# Altium PCB WB-AV-4502-PDB-REV-0.pcbdoc
Units mm, origin at the board's own origin, x right, y up, seen from the top; angles counter-clockwise.
Board outline 78.06 x 63.12 mm, 2 copper layers (Top Layer, Bottom Layer), stack 1.671 mm thick; 51 components, 31 nets, 166 pads, 131 vias.
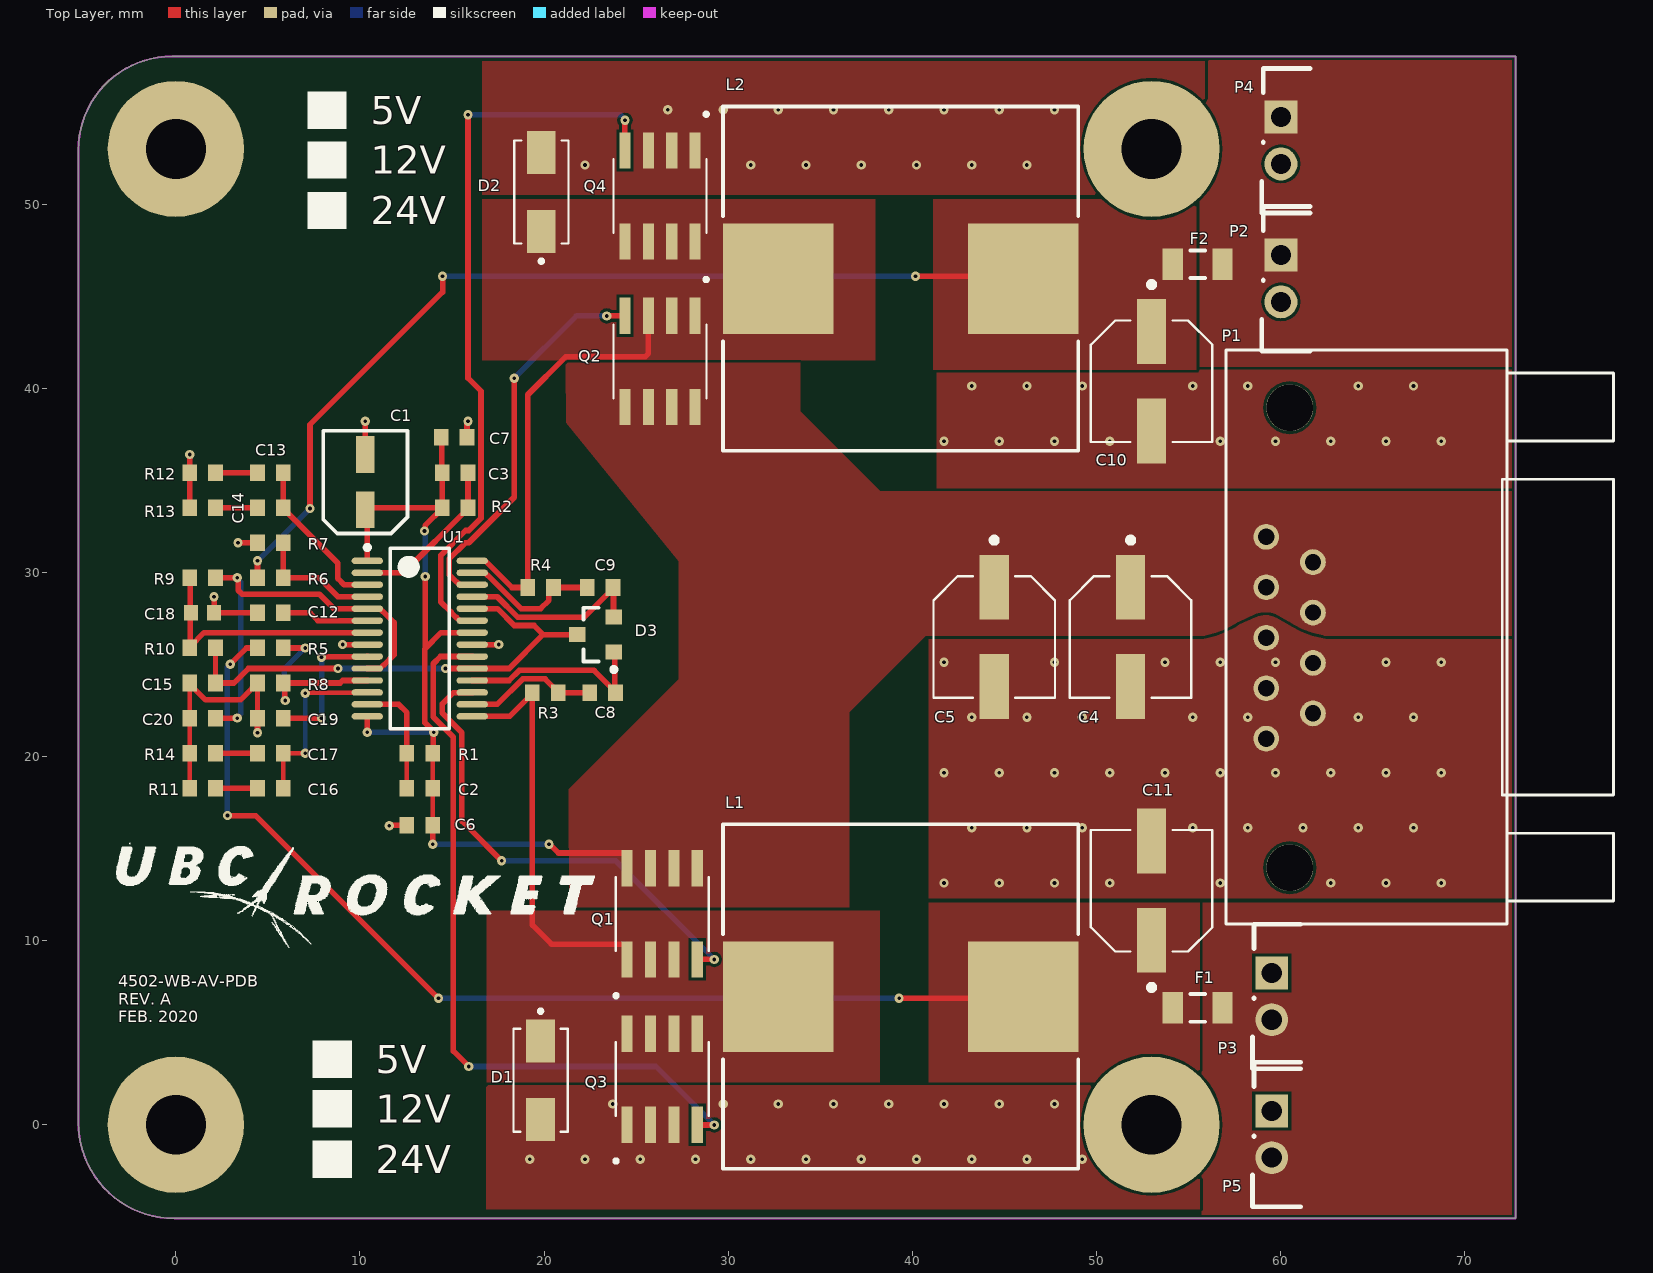
[diagram p0: Top Layer view]
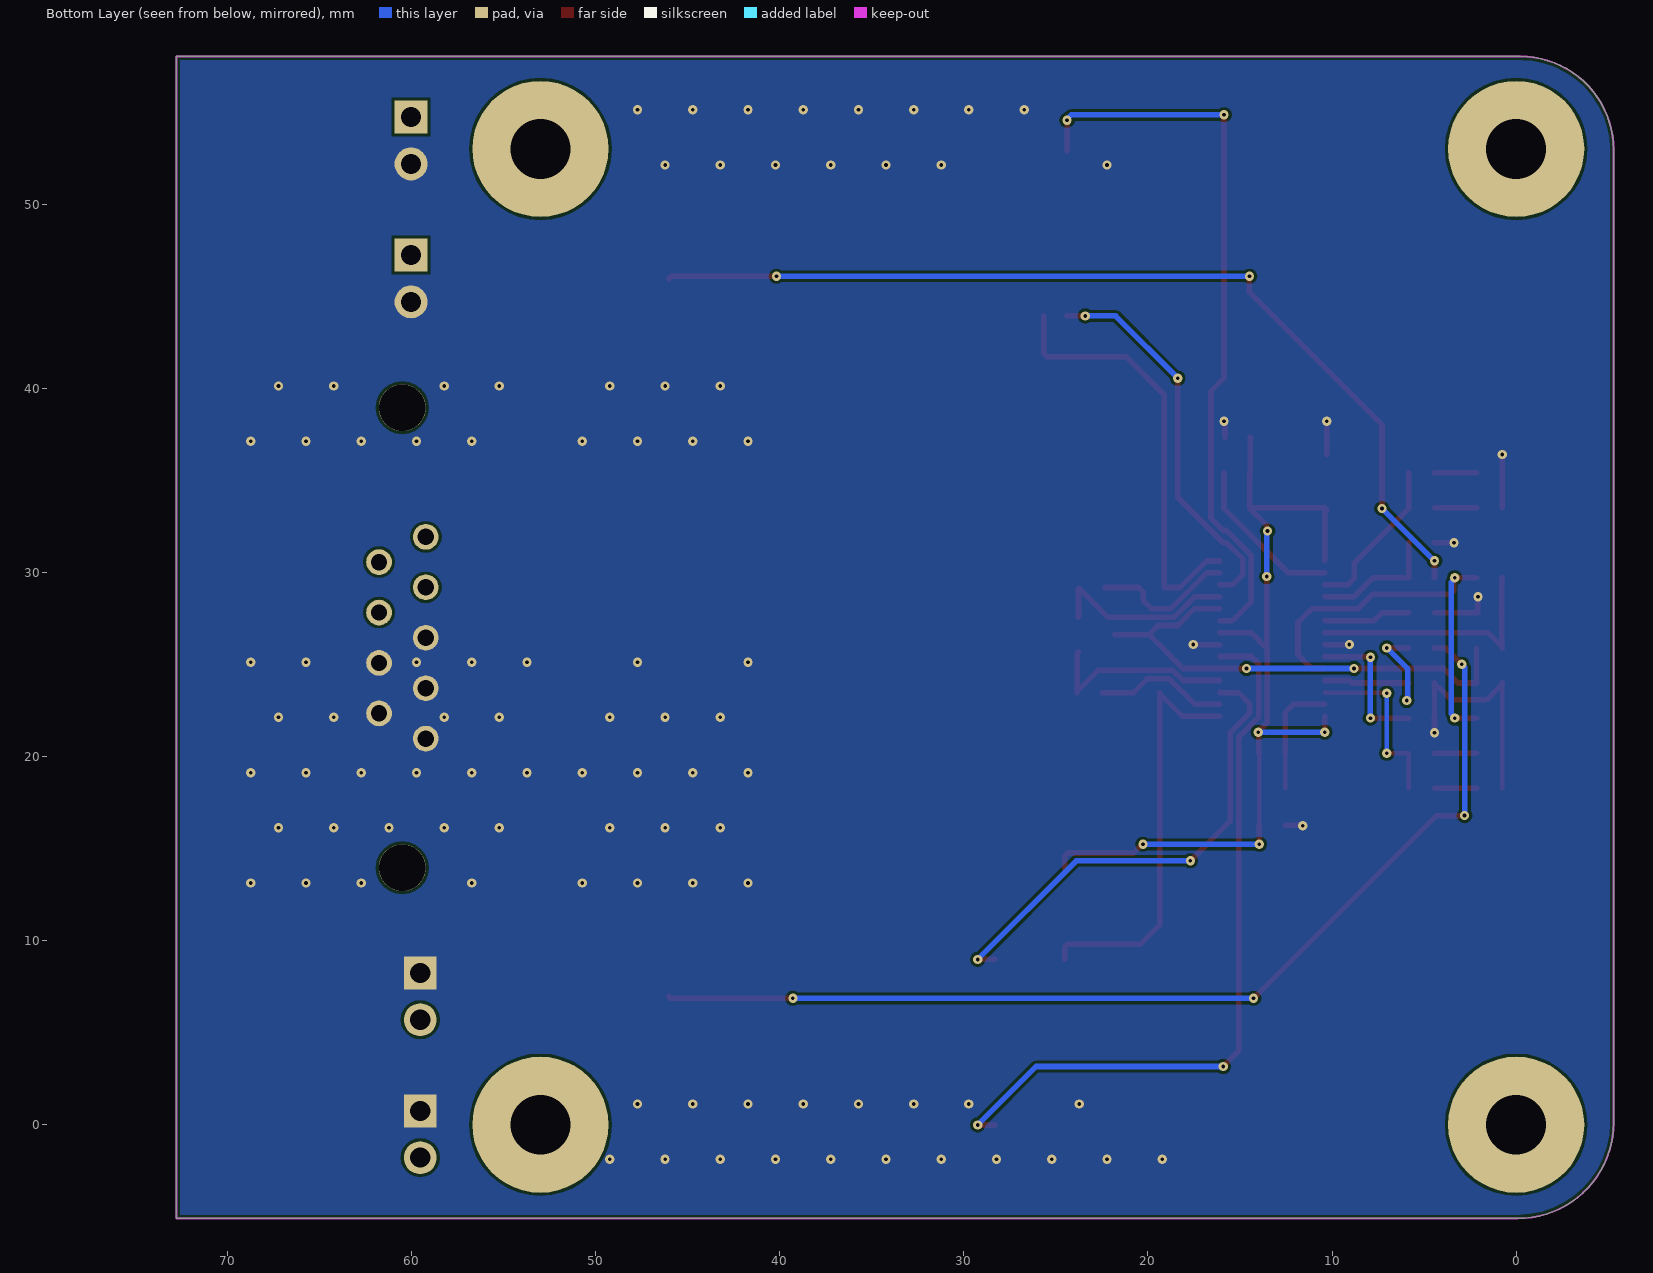
[diagram p1: Bottom Layer view, seen from below]

## Layer stack, top to bottom
Top Solder: solder mask 0.0102, Solder Resist, Dk 3.5
Top Layer: signal copper 0.0356
Dielectric 1: dielectric 1.6, FR-4, Dk 4.8
Bottom Layer: signal copper 0.0356
Bottom Solder: solder mask 0.0102, Solder Resist, Dk 3.5

## Board outline
-0.086,-5.093 72.771,-5.093 72.771,58.026 -0.213,58.026 ccw(c-0.213,52.946) -5.293,52.946 -5.293,0.114 ccw(c-0.086,0.114)

## Design rules (kind name [scope] priority, off if disabled: settings)
Clearance [All] p1: gap=0.152 ignorepadtopadclearanceinfootprint=FALSE except(0: Arc-Hole Track-Hole SMDPad-Hole THPad-Hole Via-Hole Fill-Hole Poly-Hole Region-Hole Text-Hole)
ComponentClearance [All] p1: gap=0 collisioncheckmode=3 verticalgap=0.003 showdistances=FALSE
Creepage [All] p1: checkdistance=0.254
HoleSize [All] p1: absolutevalues=TRUE maxlimit=25.4 minlimit=0.025 maxpercent=80.000 minpercent=20.000
MinimumSolderMaskSliver [All] p1: minsoldermaskwidth=0.025
PolygonConnect [All] p1: connectstyle=Direct reliefconductorwidth=0.254 reliefentries=4 polygonreliefangle="90 Angle" airgapwidth=0.254
RoomDefinition Regulators1 [InComponentClass('Regulators1')] p1: confinementstyle=ConfineIn formatcopy=TRUE lockcomponents=FALSE outline 0.168,-5.842 78.527,-5.842 78.527,57.518 0.168,57.518
RoutingVias [All] p1: holewidth=0.2 width=0.505 viastyle="Through Hole" minholewidth=0.2 minwidth=0.505 maxholewidth=0.711 maxwidth=1.27
ShortCircuit [InNet('No Net')] p1: allowed=FALSE
SilkToSilkClearance [All] p1: silktosilkclearance=0.025
SilkToSolderMaskClearance [IsPad] p1: minsilkscreentomaskgap=0.025 clearancetoexposedcopper=TRUE
SolderMaskExpansion [All] p1: expansion=0.102 istentingtop=FALSE
Width [All] p1: maxlimit=5.08 minlimit=0.254 preferedwidth=0.305
24 further rules are at their usual default settings.

## Components (designator, comment, footprint, x,y, rotation, side; value= is the part's Value field where it differs from the comment)
C1 "Cap Pol1" 1u50VcapE 10.287,34.901 r270 top value=1uF
C2 "Cap" 1608[0603] 13.249,18.275 r0 top value=10nF
C3 "Cap" 1608[0603] 15.168,35.42 r0 top value=10nF
C4 "Cap Pol1" CAPAE660X800N 51.857,26.499 r270 top value=22uF
C5 "Cap Pol1" CAPAE660X800N 44.45,26.499 r270 top value=22uF
C6 "Cap" 1608[0603] 13.249,16.256 r0 top value=10nF
C7 "Cap" 1608[0603] 15.113,37.338 r180 top value=10nF
C8 "Cap" 1608[0603] 23.176,23.462 r180 top value=0.1uF
C9 "Cap" 1608[0603] 23.049,29.177 r180 top value=0.1uF
C10 "Cap Pol1" CAPAE660X800N 53,40.381 r270 top value=100uF
C11 "Cap Pol1" CAPAE660X800N 53,12.71 r90 top value=100uF
C12 "Cap" 1608[0603] 5.135,27.8 r0 top value=0.1uF
C13 "Cap" 1608[0603] 5.135,35.42 r0 top value=22nF
C14 "Cap" 1608[0603] 5.135,33.515 r0 top value=100pF
C15 "Cap" 1608[0603] 1.452,23.99 r0 top value=1uF
C16 "Cap" 1608[0603] 5.135,18.275 r0 top value=10nF
C17 "Cap" 1608[0603] 5.135,20.18 r0 top value=56pF
C18 "GRM188R6YA475KE15D" CAPC1608X90X35LL10T15 1.452,27.8 r180 top
C19 "Cap" 1608[0603] 5.135,22.085 r0 top value=10nF
C20 "Cap" 1608[0603] 1.452,22.085 r0 top value=10nF
D1 "Diode MBRS140t3" *DIOM5227X270N_S1M(Primary) 19.812,2.413 r270 top
D2 "Diode MBRS140t3" *DIOM5227X270N_S1M(Primary) 19.853,50.659 r90 top
D3 "BAW56LT3" ONSC-SOT-23-3-318-08_V 22.795,26.623 r180 top
F1 "Fuse 1" C1206 55.499,6.35 r180 top
F2 "Fuse 1" C1206 55.499,46.736 r0 top
L1 "74435572200" WE-HCI-1890 39.37,6.962 r180 top
L2 "74435571500" WE-HCI-1890 39.37,45.951 r0 top
P1 "3-338168-2" CONN_3-338168-2 38.563,31.929 r90 top locked
P2 "Header 2" WM4900-ND 58.5,39.459 r0 top
P3 "Header 2" WM4900-ND 58,0.47 r0 top
P4 "Header 2" WM4900-ND 58.5,46.952 r0 top
P5 "Header 2" WM4900-ND 58,-7.023 r0 top
Q1 "MOSFET-N" *SOIC127P600X175-8N 26.416,11.452 r90 top
Q2 "MOSFET-N" *SOIC127P600X175-8N 26.3,41.461 r270 top
Q3 "MOSFET-N" *SOIC127P600X175-8N 26.416,2.472 r90 top
Q4 "MOSFET-N" *SOIC127P600X175-8N 26.3,50.441 r270 top
R1 "Res1" 1608[0603] 13.249,20.18 r0 top value=13k
R2 "Res1" 1608[0603] 15.168,33.515 r180 top value=13K
R3 "Res1" 1608[0603] 20.066,23.462 r180 top value=4.7k
R4 "Res1" 1608[0603] 19.812,29.177 r180 top value=4.7k
R5 "Res1" 1608[0603] 5.135,25.895 r180 top value=100k
R6 "Res1" 1608[0603] 5.135,29.705 r180 top value=60k
R7 "Res1" 1608[0603] 5.135,31.61 r0 top value=20k
R8 "Res1" 1608[0603] 5.135,23.99 r0 top value=11.5k
R9 "Res1" 1608[0603] 1.452,29.705 r0 top value=220K
R10 "Res1" 1608[0603] 1.452,25.895 r0 top value=4.7k
R11 "Res1" 1608[0603] 1.452,18.275 r0 top value=47.4k
R12 "Res1" 1608[0603] 1.452,35.42 r0 top value=20k
R13 "Res1" 1608[0603] 1.452,33.515 r0 top value=20k
R14 "Res1" 1608[0603] 1.452,20.18 r0 top value=20k
U1 "LM2642MTC/NOPB" MTC28_N 13.249,26.403 r0 top

## Footprints (in the part's own frame and the unit in brackets; to place one, negate y for a bottom-side part, rotate by r counter-clockwise, add the part's x,y. Pads: shape width x height; smd on the part's side, far side on the other; paste and mask are expansions set on the pad)
1u50VcapE [mm]
  rect 2x1 smd: 1(1.5,0) 2(-1.5,0)
  silkscreen extent -2.79,-2.29 2.79,2.3
1608[0603] [mm] "Chip Capacitor, Body 1.6x0.8mm, IPC High Density"
  rect 0.8x0.9 smd: 1(-0.7,0) 2(0.7,0)
  body extent -0.87,-0.48 0.87,0.48, height 1.3
*DIOM5227X270N_S1M(Primary) [mm]
  rect 2.33x1.56 smd: A(2.14,0) C(-2.14,0)
  silkscreen extent -3.85,-1.48 2.8,1.48
*SOIC127P600X175-8N [mm]
  rect 1.97x0.6 smd: 1(2.475,-1.905) 1(2.475,-0.635) 1(2.475,0.635) 1(2.475,1.905) 2(-2.475,-1.905) 3(-2.475,-0.635) 3(-2.475,0.635) 3(-2.475,1.905)
  silkscreen extent -4.54,-2.52 2,2.6
C1206 [mm] "Chip Capacitor, Body 3.2x1.6mm, IPC High Density"
  rect 1.1x1.7 smd: 1(-1.35,0) 2(1.35,0)
  silkscreen extent -0.4,-0.75 0.4,0.75, body extent -1.7,-0.9 1.7,0.9, height 1.3
CAPAE660X800N [mm]
  rect 3.51x1.58 smd: 1(-2.7,0) 2(2.7,0)
  silkscreen extent -5.4,-3.3 3.3,3.3, body extent -3.9,-3.3 3.9,3.3, height 8.06
CAPC1608X90X35LL10T15 [mm] "Chip Capacitor, 2-Leads, Body 1.60x0.80mm, IPC High Density"
  rect 0.75x0.85 smd: 1(-0.625,0) 2(0.625,0)
  body extent -0.85,-0.45 0.85,0.45, height 0.9
CONN_3-338168-2 [mil]
  round 55 hole 35: 1(-431.5,-813.39) 2(-377.56,-913.39) 3(-323.62,-813.39) 4(-269.69,-913.39) 5(-215.75,-813.39) 6(-161.81,-913.39) 7(-107.87,-813.39) 8(-53.94,-913.39) 9(0,-813.39)
  round 100 hole 100: 10(-707.75,-863.69) 11(276.25,-863.69)
  silkscreen extent -828,-1556 399,-727, body extent -827,-1569 397,-730, height 107
MTC28_N [mm] "TSOP, 28-Leads, Body 9.7x4.4mm, Pitch 0.65mm, IPC Medium Density"
  oval 1.7x0.35 smd: 1(-2.85,4.225) 2(-2.85,3.575) 3(-2.85,2.925) 4(-2.85,2.275) 5(-2.85,1.625) 6(-2.85,0.975) 7(-2.85,0.325) 8(-2.85,-0.325) 9(-2.85,-0.975) 10(-2.85,-1.625) 11(-2.85,-2.275) 12(-2.85,-2.925) 13(-2.85,-3.575) 14(-2.85,-4.225) 15(2.85,-4.225) 16(2.85,-3.575) 17(2.85,-2.925) 18(2.85,-2.275) 19(2.85,-1.625) 20(2.85,-0.975) 21(2.85,-0.325) 22(2.85,0.325) 23(2.85,0.975) 24(2.85,1.625) 25(2.85,2.275) 26(2.85,2.925) 27(2.85,3.575) 28(2.85,4.225)
  silkscreen extent -2.97,-4.9 1.6,5.07, body extent -2.25,-4.9 2.25,4.9, height 1.1
ONSC-SOT-23-3-318-08_V [mm] "SOT23, 3-Leads, Body 2.92x1.3mm, Pitch 0.95mm"
  rect 0.9x0.8 smd: 1(-1,0.95) 2(-1,-0.95) 3(1,0)
  silkscreen extent -1.13,-1.46 0.65,2.02, body extent -0.65,-1.46 0.65,1.46, height 1.11
WE-HCI-1890 [mm] "Inductor, 2-Leads, Body 18.3 x 18.2 mm"
  rect 6x6 smd: 1(-6.65,0) 2(6.65,0)
  silkscreen extent -9.65,-9.35 9.65,9.35, body extent -9.15,-9.1 9.15,9.1, height 8.85
WM4900-ND [mm]
  rect 1.79x1.79 hole 1.09: 1(1.524,7.772)
  round 1.79 hole 1.09: 2(1.524,5.232)
  silkscreen extent 0.48,2.57 3.1,10.42, body extent 0.89,2.84 14.48,10.21, height 7.11

## Part data
C1: "Polarized Capacitor (Radial)", LatestRevisionDate=17-Jul-2002, LatestRevisionNote="Re-released for DXP Platform.", PackageDescription="Polarized Capacitor (Radial); 2 Leads", PackageReference=RB7.6-15, Published=8-Jun-2000, Publisher="Altium Limited"
C2 C3 C6 C7 C16 C19 C20: "CAP CER 10000PF 100V NP0 0603", Capacitance=10nF, Case Code (Imperial)=0603, Case Code (Metric)=1608, Manufacturer=TDK, Manufacturer Part Number=CGA3EANP02A103J080AC, Max Operating Temperature=150°C, Min Operating Temperature=-55°C, Package Quantity=1, Ratings=AEC-Q200, Supplier Part Number 1=445-16165-1-ND, Tolerance=5%, Voltage Rating=100V, Case/Package=0603, Category="Ceramic Capacitors", ComponentLink1Description=https://datasheet.ciiva.com/29540/mlcc-automotive-esd-en-29540271.pdf?src-supplier=Digi-Key, ComponentLink1URL=https://datasheet.ciiva.com/29540/mlcc-automotive-esd-en-29540271.pdf?src-supplier=Digi-Key, LatestRevisionDate=17-Jul-2002, LatestRevisionNote="Re-released for DXP Platform.", Length=0.063inch, Mount="Surface Mount", PackageDescription="Radial Cap, Thru-Hole; 2 Leads; 0.3 in Pin Spacing", PackageReference=RAD-0.3, Packaging="Cut Tape", Pricing 1="1=0.39000, 10=0.27200, 100=0.16300, 500=0.12226, 1000=0.10324 (USD)", Published=8-Jun-2000, Publisher="Altium Limited", RoHS=Yes, Stock 1=406, Supplier 1=Digi-Key, Thickness=0.035inch, Width=0.031inch
C4 C5: "Polarized Capacitor (Radial)", Supplier Part Number 1=P122128CT-ND, LatestRevisionDate=17-Jul-2002, LatestRevisionNote="Re-released for DXP Platform.", PackageDescription="Polarized Capacitor (Radial); 2 Leads", PackageReference=RB7.6-15, Published=8-Jun-2000, Publisher="Altium Limited", Supplier 1=Digi-Key
C8 C9 C12: "CAP CER 0.1UF 50V X7R 0603", Capacitance=100nF, Case Code (Imperial)=0603, Case Code (Metric)=1608, Dielectric=X7R, Manufacturer=Murata, Manufacturer Part Number=GCM188R71H104JA57D, Max Operating Temperature=125°C, Min Operating Temperature=-55°C, Ratings=AEC-Q200, Supplier Part Number 1=490-14357-1-ND, Tolerance=5%, Voltage Rating=50V, Case/Package=0603, Category="Ceramic Capacitors", ComponentLink1Description=http://search.murata.co.jp/Ceramy/image/img/A01X/partnumbering_e_02.pdf?src-supplier=Digi-Key, ComponentLink1URL=http://search.murata.co.jp/Ceramy/image/img/A01X/partnumbering_e_02.pdf?src-supplier=Digi-Key, ComponentLink2Description=https://www.murata.com/~/media/webrenewal/support/library/catalog/products/capacitor/mlcc/c03e.ashx?la=en-us&src-supplier=Digi-Key, ComponentLink2URL=https://www.murata.com/~/media/webrenewal/support/library/catalog/products/capacitor/mlcc/c03e.ashx?la=en-us&src-supplier=Digi-Key, LatestRevisionDate=17-Jul-2002, LatestRevisionNote="Re-released for DXP Platform.", Mount="Surface Mount", PackageDescription="Radial Cap, Thru-Hole; 2 Leads; 0.3 in Pin Spacing", PackageReference=RAD-0.3, Packaging="Cut Tape", Pricing 1="1=0.32000, 10=0.22100, 100=0.13260, 500=0.09944, 1000=0.08397 (USD)", Published=8-Jun-2000, Publisher="Altium Limited", RoHS=No, Stock 1=31481, Supplier 1=Digi-Key, Voltage Rating (DC)=50V
C10 C11: "Polarized Capacitor (Radial)", Supplier Part Number 1=P121401CT-ND, LatestRevisionDate=17-Jul-2002, LatestRevisionNote="Re-released for DXP Platform.", PackageDescription="Polarized Capacitor (Radial); 2 Leads", PackageReference=RB7.6-15, Published=8-Jun-2000, Publisher="Altium Limited", SPN=P121401TR-ND, Supplier 1=Digi-Key
C13: "0603 22 nF 50 V ±5% Tolerance X7R SMT Multilayer Ceramic Capacitor", Capacitance=22nF, Case Code (Imperial)=0603, Case Code (Metric)=1608, Dielectric=X7R, Manufacturer="Walsin Technologies", Manufacturer Part Number=0603B223J500CT, Max Operating Temperature=125°C, Min Operating Temperature=-55°C, Supplier Part Number 1=1292-1414-1-ND, Tolerance=5%, Voltage Rating=50V, Case/Package=0603, Category=Uncategorized, ComponentLink1Description=https://datasheet.ciiva.com/26864/getdatasheetpartid-660917-26864527.pdf?src-supplier=Verical, ComponentLink1URL=https://datasheet.ciiva.com/26864/getdatasheetpartid-660917-26864527.pdf?src-supplier=Verical, ComponentLink2Description=http://datasheet.octopart.com/0603B223J500CT-Walsin-Technologies-datasheet-62066062.pdf?src-supplier=Element14, ComponentLink2URL=http://datasheet.octopart.com/0603B223J500CT-Walsin-Technologies-datasheet-62066062.pdf?src-supplier=Element14, ComponentLink3Description=http://datasheet.octopart.com/0603B223J500CT-Walsin-Technologies-datasheet-85392065.pdf?src-supplier=Element14, ComponentLink3URL=http://datasheet.octopart.com/0603B223J500CT-Walsin-Technologies-datasheet-85392065.pdf?src-supplier=Element14, ComponentLink4Description=http://datasheet.octopart.com/0603B223J500CT-Walsin-Technologies-datasheet-26371553.pdf, ComponentLink4URL=http://datasheet.octopart.com/0603B223J500CT-Walsin-Technologies-datasheet-26371553.pdf, Depth=0.8mm, LatestRevisionDate=17-Jul-2002, LatestRevisionNote="Re-released for DXP Platform.", Lead Free="Lead Free", Length=1.6mm, PackageDescription="Radial Cap, Thru-Hole; 2 Leads; 0.3 in Pin Spacing", PackageReference=RAD-0.3, Packaging="Tape and Reel", Pricing 1="1=0.10000, 10=0.07500, 100=0.03350, 500=0.02390, 1000=0.01879 (USD)", Published=8-Jun-2000, Publisher="Altium Limited", Radiation Hardening=No, REACH SVHC=Unknown, Stock 1=14260, Supplier 1=Digi-Key, Voltage Rating (DC)=50V
C14: "Multilayer Ceramic Capacitors MLCC - SMD/SMT 100pF 50V X7R 5%", Capacitance=100pF, Case Code (Imperial)=0603, Case Code (Metric)=1608, Dielectric=X7R, Manufacturer=Yageo, Manufacturer Part Number=CC0603JRX7R9BB101, Max Operating Temperature=125°C, Min Operating Temperature=-55°C, Package Quantity=4000, Supplier Part Number 1=311-4003-1-ND, Tolerance=5%, Voltage Rating=50V, Case/Package=0603, Category="Ceramic Capacitors", ComponentLink1Description=https://datasheet.ciiva.com/26862/getdatasheetpartid-408467-26862784.pdf?src-supplier=Verical, ComponentLink1URL=https://datasheet.ciiva.com/26862/getdatasheetpartid-408467-26862784.pdf?src-supplier=Verical, ComponentLink2Description=https://datasheet.ciiva.com/5427/upy-gphc-x7r-6-3v-to-50v-9-270870-5427704.pdf?src-supplier=Mouser, ComponentLink2URL=https://datasheet.ciiva.com/5427/upy-gphc-x7r-6-3v-to-50v-9-270870-5427704.pdf?src-supplier=Mouser, ComponentLink3Description=https://datasheet.ciiva.com/17436/upy-gphc-x7r-6-3v-to-50v-8-17436870.pdf?src-supplier=Avnet+Europe, ComponentLink3URL=https://datasheet.ciiva.com/17436/upy-gphc-x7r-6-3v-to-50v-8-17436870.pdf?src-supplier=Avnet+Europe, ComponentLink4Description=https://datasheet.ciiva.com/11465/upy-gphc-x7r-6-3v-to-50v-8-11465037.pdf?src-supplier=Avnet, ComponentLink4URL=https://datasheet.ciiva.com/11465/upy-gphc-x7r-6-3v-to-50v-8-11465037.pdf?src-supplier=Avnet, Composition=Ceramic, Depth=0.8mm, Halogen Free="Halogen Free", LatestRevisionDate=17-Jul-2002, LatestRevisionNote="Re-released for DXP Platform.", Lead Free="Lead Free", Length=1.6mm, Mount="Surface Mount", PackageDescription="Radial Cap, Thru-Hole; 2 Leads; 0.3 in Pin Spacing", PackageReference=RAD-0.3, Packaging="Tape and Reel", Pricing 1="1=0.11000, 10=0.08200, 100=0.03840, 500=0.02690, 1000=0.02228 (USD)", Published=8-Jun-2000, Publisher="Altium Limited", Radiation Hardening=No, RoHS=Yes, Stock 1=2652, Supplier 1=Digi-Key, Termination=SMD/SMT, Thickness=0.035inch, Voltage Rating (DC)=50V, Width=0.031inch
C15: "Cap Ceramic 1uF 50V X5R 10% SMD 0603 85C Cardboard T/R", Capacitance=1uF, Case Code (Imperial)=0603, Case Code (Metric)=1608, Dielectric=X5R, Manufacturer=Samsung, Manufacturer Part Number=CL10A105KB8NNNC, Max Operating Temperature=85°C, Min Operating Temperature=-55°C, Package Quantity=1, Supplier Part Number 1=1276-1860-6-ND, Tolerance=10%, Voltage Rating=50V, Case/Package=0603, Category="Ceramic Capacitors", ComponentLink1Description=https://datasheet.ciiva.com/26877/getdatasheetpartid-753736-26877879.pdf?src-supplier=Verical, ComponentLink1URL=https://datasheet.ciiva.com/26877/getdatasheetpartid-753736-26877879.pdf?src-supplier=Verical, Contact Plating=Tin, Depth=0.8mm, LatestRevisionDate=17-Jul-2002, LatestRevisionNote="Re-released for DXP Platform.", Length=1.6mm, Mount="Surface Mount", PackageDescription="Radial Cap, Thru-Hole; 2 Leads; 0.3 in Pin Spacing", PackageReference=RAD-0.3, Packaging="Tape and Reel", Pricing 1="1=0.17000, 10=0.12100, 100=0.05680, 500=0.03982, 1000=0.03297 (USD)", Published=8-Jun-2000, Publisher="Altium Limited", Radiation Hardening=No, RoHS=Yes, Stock 1=1011841, Supplier 1=Digi-Key, Termination=Wraparound, Thickness=0.035inch, Width=0.031inch
C17: "Chip Capacitor 0603 MLCC NPO 56 pF+/- 1% 50 V T&R GP", Capacitance=56pF, Case/Package=0603, Dielectric=C0G, Manufacturer="Walsin Technologies", Manufacturer Part Number=0603N560F500CT, Max Operating Temperature=125°C, Min Operating Temperature=-55°C, Supplier Part Number 1=1292-1533-1-ND, Tolerance=1%, Category=Uncategorized, ComponentLink1Description=http://components.arrow.com/part/dataview/0323_03468640?src-supplier=Arrow+Europe, ComponentLink1URL=http://components.arrow.com/part/dataview/0323_03468640?src-supplier=Arrow+Europe, ComponentLink2Description=http://datasheet.octopart.com/0603N560F500CT-Walsin-Technologies-datasheet-26371553.pdf, ComponentLink2URL=http://datasheet.octopart.com/0603N560F500CT-Walsin-Technologies-datasheet-26371553.pdf, Depth=0.8mm, LatestRevisionDate=17-Jul-2002, LatestRevisionNote="Re-released for DXP Platform.", Length=1.6mm, PackageDescription="Radial Cap, Thru-Hole; 2 Leads; 0.3 in Pin Spacing", PackageReference=RAD-0.3, Packaging="Tape and Reel", Pricing 1="1=0.12000, 10=0.09000, 100=0.04030, 500=0.02876, 1000=0.02260 (USD)", Published=8-Jun-2000, Publisher="Altium Limited", Stock 1=4492, Supplier 1=Digi-Key
C18: library part CMP-2006-02545-1, Manufacturer=Murata, Part Number=GRM188R6YA475KE15D
D1 D2: library part "Diode 18TQ045", "Schottky Rectifier", Supplier Part Number 1=MBRS140T3GOSCT-ND, ComponentLink1Description="Manufacturer Link", ComponentLink1URL=http://www.irf.com/, ComponentLink2Description=Datasheet, ComponentLink2URL=http://www.irf.com/product-info/datasheets/data/18tq.pdf, DatasheetVersion=Dec-1997, LatestRevisionDate=17-Jul-2002, LatestRevisionNote="Re-released for DXP Platform.", Note="Terminal 2 is the TAB and is electrically connected to the cathode", PackageDescription="TO, Thru-Hole, Vertical, Heatsink Mounted; 3 In-Line Leads (1 Absent); Pitch 2.54 mm", PackageReference=TO-220AC, PackageVersion=Feb-1998, Published=8-Jun-2000, Publisher="Altium Limited", SPN=MBRS140T3GOSCT-ND, Supplier 1=Digi-Key
D3: "Diode Small Signal Switching 70V 0.2A Automotive 3-Pin SOT-23 T/R", Average Rectified Current=200mA, Case/Package=SOT-23-3, Forward Voltage=1.25V, Manufacturer="On Semiconductor", Manufacturer Part Number=BAW56LT3G, Max Forward Surge Current (Ifsm)=4A, Max Operating Temperature=150°C, Max Repetitive Reverse Voltage (Vrrm)=70V, Max Reverse Leakage Current=2.5uA, Min Operating Temperature=-55°C, Package Quantity=10000, Power Dissipation=300mW, Supplier Part Number 1=BAW56LT3GOSCT-ND, Category="Rectifier Diodes", ComponentLink1Description="Manufacturer URL", ComponentLink1URL=http://www.onsemi.com/, ComponentLink2Description=Datasheet, ComponentLink2URL=http://www.onsemi.cn/pub_link/Collateral/BAW56LT1-D.PDF, ComponentLink3Description="Package Specification", ComponentLink3URL=http://www.onsemi.cn/pub_link/Collateral/318-08.PDF, ComponentLink4Description=https://datasheet.ciiva.com/905/baw56lt1-d-905777.pdf?src-supplier=Avnet, ComponentLink4URL=https://datasheet.ciiva.com/905/baw56lt1-d-905777.pdf?src-supplier=Avnet, ComponentLink5Description=https://datasheet.ciiva.com/908/baw56lt1-d-908265.pdf?src-supplier=Digi-Key, ComponentLink5URL=https://datasheet.ciiva.com/908/baw56lt1-d-908265.pdf?src-supplier=Digi-Key, ComponentLink6Description=https://datasheet.ciiva.com/908/baw56lt1-d-908266.pdf?src-supplier=Digi-Key, ComponentLink6URL=https://datasheet.ciiva.com/908/baw56lt1-d-908266.pdf?src-supplier=Digi-Key, ComponentLink7Description=https://datasheet.ciiva.com/8053/baw56lt1-d-8053691.pdf?src-supplier=Element14, ComponentLink7URL=https://datasheet.ciiva.com/8053/baw56lt1-d-8053691.pdf?src-supplier=Element14, ComponentLink8Description=https://datasheet.ciiva.com/908/baw56lt1-d-908264.pdf?src-supplier=Digi-Key, ComponentLink8URL=https://datasheet.ciiva.com/908/baw56lt1-d-908264.pdf?src-supplier=Digi-Key, ComponentLink9Description=http://datasheet.octopart.com/BAW56LT3G-ON-Semiconductor-datasheet-8326890.pdf?src-supplier=ON+Semiconductor, ComponentLink9URL=http://datasheet.octopart.com/BAW56LT3G-ON-Semiconductor-datasheet-8326890.pdf?src-supplier=ON+Semiconductor, ComponentLink10Description=http://datasheet.octopart.com/BAW56LT3G-ON-Semiconductor-datasheet-572709.pdf?src-supplier=ON+Semiconductor, ComponentLink10URL=http://datasheet.octopart.com/BAW56LT3G-ON-Semiconductor-datasheet-572709.pdf?src-supplier=ON+Semiconductor, ComponentLink11Description=http://datasheet.octopart.com/BAW56LT3G-ON-Semiconductor-datasheet-93401127.pdf?src-supplier=ON+Semiconductor, ComponentLink11URL=http://datasheet.octopart.com/BAW56LT3G-ON-Semiconductor-datasheet-93401127.pdf?src-supplier=ON+Semiconductor, ComponentLink12Description=http://datasheet.octopart.com/BAW56LT3G-ON-Semiconductor-datasheet-12530666.pdf?src-supplier=Newark, ComponentLink12URL=http://datasheet.octopart.com/BAW56LT3G-ON-Semiconductor-datasheet-12530666.pdf?src-supplier=Newark, ComponentLink13Description=http://datasheet.octopart.com/BAW56LT3G-ON-Semiconductor-datasheet-11771802.pdf?src-supplier=Arrow, ComponentLink13URL=http://datasheet.octopart.com/BAW56LT3G-ON-Semiconductor-datasheet-11771802.pdf?src-supplier=Arrow, Configuration="Common Anode", Contact Plating=Tin, Current Rating=200mA, DatasheetVersion="Rev. 8", Element Configuration="Common Anode", Forward Current=200mA, Halogen Free="Halogen Free", Height=1.01mm, IF Max (A)=0.2, Lead Free="Lead Free", Length=3.04mm, Max Reverse Voltage (DC)=70V, Max Surge Current=4A, Mounting Technology="Surface Mount", Note=0, Number of Pins=3, PackageDescription="3-Pin Small Outline Transistor, Body 2.92 x 1.3 mm, Pitch 0.95 mm", PackageReference=SOT-23-3-318-08, PackageVersion="Rev. AP, 11/2009", Packaging="Tape and Reel", Packing="Tape and Reel", PartNumber=BAW56LT3, Peak Non-Repetitive Surge Current=4A, Peak Reverse Current=2.5uA, Pricing 1="1=0.10000, 10=0.09200, 25=0.08760, 100=0.03850, 250=0.03696, 500=0.03024, 1000=0.02100, 2500=0.01834, 5000=0.01645 (USD)", Radiation Hardening=No, REACH SVHC="No SVHC", Recovery Time=6ns, Reverse Recovery Time=6ns, RoHS=FALSE, SPN=BAW56LT3GOSCT-ND, Stock 1=152542, Supplier 1=Digi-Key, trr Max (ns)=6, Voltage Rating (DC)=70V, Width=1.4mm
F1 F2: "Fuse", LatestRevisionDate=17-Jul-2002, LatestRevisionNote="Re-released for DXP Platform.", PackageDescription="Thru-Hole; 2 Leads", PackageReference=PIN-W2/E2.8, Published=8-Jun-2000, Publisher="Altium Limited", SPN=118-MF-NSML600/6-2TR-ND
L1: library part CMP-0226-00010-1, "SMD Flat Wire High Current Inductor WE-HCI, L=22.0 µH", Inductance="22.0 ÂµH", ComponentLink1Description="Manufacturer Link", ComponentLink1URL=http://www.we-online.com, ComponentLink2Description=Datasheet, ComponentLink2URL=http://www.we-online.de/katalog/media/pdf/74435572200.pdf, DatasheetVersion="ver 2, Nov-2009", PackageDescription="Inductor, 2-Leads, Body 18.3 x 18.2 mm", PackageReference=WE-HCI-1890, PackageVersion=2009
L2: library part CMP-0226-00009-1, "SMD Flat Wire High Current Inductor WE-HCI, L=15.0 µH", Inductance="15.0 ÂµH", ComponentLink1Description="Manufacturer Link", ComponentLink1URL=http://www.we-online.com, ComponentLink2Description=Datasheet, ComponentLink2URL=http://www.we-online.de/katalog/media/pdf/74435571500.pdf, DatasheetVersion="ver 2, Nov-2009", PackageDescription="Inductor, 2-Leads, Body 18.3 x 18.2 mm", PackageReference=WE-HCI-1890, PackageVersion=2009
P1: library part "Header 9", "Header, 9-Pin", Supplier Part Number 1=A105035-ND, LatestRevisionDate=17-Jul-2002, LatestRevisionNote="Re-released for DXP Platform.", MPN=3-338168-2, Publisher="Altium Limited", SPN=A105035-ND, Supplier 1=Digi-Key
P2 P3 P4 P5: "Header, 2-Pin", Supplier Part Number 1=WM4900-ND, LatestRevisionDate=17-Jul-2002, LatestRevisionNote="Re-released for DXP Platform.", Publisher="Altium Limited", Supplier 1=Digi-Key
Q1 Q2 Q3 Q4: "N-Channel MOSFET", Supplier Part Number 1=FDS6690ASCT-ND, LatestRevisionDate=17-Jul-2002, LatestRevisionNote="Re-released for DXP Platform.", PackageDescription="TO, Flat Index; 3 In-Line, Axial Leads; Body Dia. 4.6mm; Lead Dia. 0.5 mm (max)", PackageReference=E3, PackageVersion=1995/1996, Published=8-Jun-2000, Publisher="Altium Limited", SPN=FDS6690ASCT-ND, Supplier 1=Digi-Key
R1 R2: "PANASONIC   ERJPA3F1302V   RESISTOR, ERJP, 13 KOHM, 0603, 0.25W, 1%", Case Code (Imperial)=0603, Case Code (Metric)=1608, Manufacturer=Panasonic, Manufacturer Part Number=ERJ-PA3F1302V, Max Operating Temperature=155°C, Max Power Dissipation=250mW, Min Operating Temperature=-55°C, Resistance=13kR, Supplier Part Number 1=P13KBYCT-ND, Temperature Coefficient=100ppm/°C, Tolerance=1%, Voltage Rating=150V, Case/Package=0603, Category="Chip SMD Resistors", ComponentLink1Description=https://datasheet.ciiva.com/22681/1801181-22681719.pdf?src-supplier=Element14, ComponentLink1URL=https://datasheet.ciiva.com/22681/1801181-22681719.pdf?src-supplier=Element14, ComponentLink2Description=https://datasheet.ciiva.com/49048/1801181-49048140.pdf?src-supplier=Element14, ComponentLink2URL=https://datasheet.ciiva.com/49048/1801181-49048140.pdf?src-supplier=Element14, Composition="Thick Film", Contact Plating=Tin, Depth=0.8mm, Features="Automotive AEC-Q200", Height=0.018inch, LatestRevisionDate=17-Jul-2002, LatestRevisionNote="Re-released for DXP Platform.", Length=1.6mm, Mount="Surface Mount", Number of Terminations=2, PackageDescription="Axial Device, Thru-Hole; 2 Leads; 0.3 in Pin Spacing", PackageReference=AXIAL-0.3, Packaging="Cut Tape", Power Rating=250mW, Pricing 1="1=0.14000, 10=0.12700, 100=0.04900, 1000=0.02156, 2500=0.01862 (USD)", Published=8-Jun-2000, Publisher="Altium Limited", REACH SVHC="No SVHC", RoHS=Yes, Stock 1=12174, Supplier 1=Digi-Key, Termination=Wraparound, Voltage Rating (DC)=150V, Width=0.031inch
R3 R4: "PANASONIC   ERJPA3F4701V   RESISTOR, ERJP, 4.7KOHM, 0603, 0.25W, 1%", Case Code (Imperial)=0603, Case Code (Metric)=1608, Manufacturer=Panasonic, Manufacturer Part Number=ERJ-PA3F4701V, Max Operating Temperature=155°C, Max Power Dissipation=250mW, Min Operating Temperature=-55°C, Resistance=4.7kR, Supplier Part Number 1=P4.7KBYCT-ND, Temperature Coefficient=100ppm/°C, Tolerance=1%, Voltage Rating=150V, Case/Package=0603, Category="Chip SMD Resistors", ComponentLink1Description=https://datasheet.ciiva.com/22781/1801181-22781562.pdf?src-supplier=Farnell, ComponentLink1URL=https://datasheet.ciiva.com/22781/1801181-22781562.pdf?src-supplier=Farnell, ComponentLink2Description=https://datasheet.ciiva.com/22667/1801181-22667926.pdf?src-supplier=Element14, ComponentLink2URL=https://datasheet.ciiva.com/22667/1801181-22667926.pdf?src-supplier=Element14, Composition="Thick Film", Contact Plating=Tin, Depth=0.8mm, Features="Automotive AEC-Q200", Height=0.018inch, LatestRevisionDate=17-Jul-2002, LatestRevisionNote="Re-released for DXP Platform.", Length=0.063inch, Mount="Surface Mount", Number of Terminations=2, PackageDescription="Axial Device, Thru-Hole; 2 Leads; 0.3 in Pin Spacing", PackageReference=AXIAL-0.3, Packaging="Cut Tape", Power Rating=250mW, Pricing 1="1=0.14000, 10=0.12700, 100=0.04900, 1000=0.02156, 2500=0.01862 (USD)", Published=8-Jun-2000, Publisher="Altium Limited", REACH SVHC="No SVHC", RoHS=Yes, Stock 1=29328, Supplier 1=Digi-Key, Termination=Solder, Voltage Rating (DC)=150V, Width=0.031inch
R5: "ERJPA3 Resistors 0.25W 0603 100K 1%", Case Code (Imperial)=0603, Case Code (Metric)=1608, Manufacturer=Panasonic, Manufacturer Part Number=ERJ-PA3F1003V, Max Operating Temperature=155°C, Max Power Dissipation=250mW, Min Operating Temperature=-55°C, Resistance=100kR, Supplier Part Number 1=P100KBYCT-ND, Temperature Coefficient=100ppm/°C, Tolerance=1%, Voltage Rating=150V, Case/Package=0603, Category="Chip SMD Resistors", ComponentLink1Description=https://datasheet.ciiva.com/22781/1801181-22781557.pdf?src-supplier=Farnell, ComponentLink1URL=https://datasheet.ciiva.com/22781/1801181-22781557.pdf?src-supplier=Farnell, ComponentLink2Description=https://datasheet.ciiva.com/49048/1801181-49048299.pdf?src-supplier=Element14, ComponentLink2URL=https://datasheet.ciiva.com/49048/1801181-49048299.pdf?src-supplier=Element14, Composition="Thick Film", Depth=0.8mm, Features="Automotive AEC-Q200", Height=0.018inch, LatestRevisionDate=17-Jul-2002, LatestRevisionNote="Re-released for DXP Platform.", Length=0.063inch, Mount="Surface Mount", Number of Terminations=2, PackageDescription="Axial Device, Thru-Hole; 2 Leads; 0.3 in Pin Spacing", PackageReference=AXIAL-0.3, Packaging="Cut Tape", Power Rating=250mW, Pricing 1="1=0.14000, 10=0.12700, 100=0.04900, 1000=0.02156, 2500=0.01862 (USD)", Published=8-Jun-2000, Publisher="Altium Limited", REACH SVHC="No SVHC", RoHS=Yes, Stock 1=48831, Supplier 1=Digi-Key, Termination=Solder, Voltage Rating (DC)=150V, Width=0.031inch
R6: "RES SMD 60.4K OHM 0.1% 1/5W 0603", Case Code (Imperial)=0603, Case Code (Metric)=1608, Manufacturer=Panasonic, Manufacturer Part Number=ERJ-PB3B6042V, Max Operating Temperature=155°C, Max Power Dissipation=200mW, Min Operating Temperature=-55°C, Resistance=60.4kR, Supplier Part Number 1=P20175CT-ND, Temperature Coefficient=50ppm/°C, Tolerance=0.1%, Case/Package=0603, Category="Chip SMD Resistors", ComponentLink1Description=https://industrial.panasonic.com/sa/system/files/data/download/catalog/id_fixed-resistors_e_2.pdf?src-supplier=Digi-Key, ComponentLink1URL=https://industrial.panasonic.com/sa/system/files/data/download/catalog/id_fixed-resistors_e_2.pdf?src-supplier=Digi-Key, ComponentLink2Description=https://industrial.panasonic.com/cdbs/www-data/pdf/RDM0000/DMM0000COL5.pdf?src-supplier=Digi-Key, ComponentLink2URL=https://industrial.panasonic.com/cdbs/www-data/pdf/RDM0000/DMM0000COL5.pdf?src-supplier=Digi-Key, Composition="Thick Film", Features="Automotive AEC-Q200", Height - Seated (Max)=0.022inch, LatestRevisionDate=17-Jul-2002, LatestRevisionNote="Re-released for DXP Platform.", Length=0.063inch, Number of Terminations=2, PackageDescription="Axial Device, Thru-Hole; 2 Leads; 0.3 in Pin Spacing", PackageReference=AXIAL-0.3, Packaging="Tape and Reel", Pricing 1="1=0.25000, 10=0.21100, 25=0.15320, 50=0.11100, 100=0.08230, 250=0.06316, 500=0.04976, 1000=0.03445 (USD)", Published=8-Jun-2000, Publisher="Altium Limited", RoHS=Yes, Stock 1=1247, Supplier 1=Digi-Key, Width=0.032inch
R7 R12 R13 R14: "RES SMD 20K OHM 0.1% 1/10W 0603", Case/Package=0603, Manufacturer="TE Connectivity AMP", Manufacturer Part Number=RP73D1J20KBTG, Number of Resistors=1, Power Rating=100mW, Resistance=20kR, Supplier Part Number 1=RP73D1J20KBTG-ND, Temperature Coefficient=15ppm/°C, Tolerance=0.1%, Voltage Rating=75V, Category="Chip SMD Resistors", ComponentLink1Description=http://www.te.com/commerce/DocumentDelivery/DDEController?Action=srchrtrv&DocNm=1773272&DocType=DS&DocLang=English&src-supplier=Digi-Key, ComponentLink1URL=http://www.te.com/commerce/DocumentDelivery/DDEController?Action=srchrtrv&DocNm=1773272&DocType=DS&DocLang=English&src-supplier=Digi-Key, ELV=Compliant, LatestRevisionDate=17-Jul-2002, LatestRevisionNote="Re-released for DXP Platform.", Mount="Surface Mount", Number of Terminations=2, PackageDescription="Axial Device, Thru-Hole; 2 Leads; 0.3 in Pin Spacing", PackageReference=AXIAL-0.3, Packaging="Cut Tape", Pricing 1="250=0.75212 (USD)", Published=8-Jun-2000, Publisher="Altium Limited", RoHS=No, Supplier 1=Digi-Key, Termination=Solder
R8: "Thin Film Resistors RN 0603 11K5 0.1% 10PPM CUT LENGTH", Case Code (Imperial)=0603, Case Code (Metric)=1608, Manufacturer="TE Connectivity", Manufacturer Part Number=RN73C1J11K5BTG, Max Operating Temperature=155°C, Min Operating Temperature=-55°C, Number of Resistors=1, Package Quantity=250, Power Rating=63mW, Resistance=11.5kR, Supplier Part Number 1=20R7126, Temperature Coefficient=10ppm/°C, Tolerance=0.1%, Voltage Rating=50V, Case/Package=0603, Category="Chip SMD Resistors", ComponentLink1Description=http://components.arrow.com/part/dataview/0323_02389628?src-supplier=Arrow+Europe, ComponentLink1URL=http://components.arrow.com/part/dataview/0323_02389628?src-supplier=Arrow+Europe, ComponentLink2Description=http://www.mouser.com/ds/2/418/NG_CD_1614350_BA-654184.pdf?src-supplier=Mouser, ComponentLink2URL=http://www.mouser.com/ds/2/418/NG_CD_1614350_BA-654184.pdf?src-supplier=Mouser, ComponentLink3Description=https://media.digikey.com/pdf/Data%20Sheets/Tyco%20Electonics%20AMP%20PDFs/RN73_Series_2011.pdf?src-supplier=Digi-Key, ComponentLink3URL=https://media.digikey.com/pdf/Data%20Sheets/Tyco%20Electonics%20AMP%20PDFs/RN73_Series_2011.pdf?src-supplier=Digi-Key, Composition="Thin Film", Depth=0.8mm, ELV=Compliant, Height=0.45mm, LatestRevisionDate=17-Jul-2002, LatestRevisionNote="Re-released for DXP Platform.", Length=1.55mm, Military Standard=Not, Mount="Surface Mount", Number of Terminations=2, PackageDescription="Axial Device, Thru-Hole; 2 Leads; 0.3 in Pin Spacing", PackageReference=AXIAL-0.3, Packaging="Cut Tape", Pricing 1="250=1.20000, 1000=1.16000, 2000=1.12000, 4000=1.09000, 6000=1.06000, 10000=1.03000 (CAD)", Published=8-Jun-2000, Publisher="Altium Limited", RoHS=Yes, Supplier 1=Newark, Termination=Solder, Width=0.8mm
R9: "RES SMD 220K OHM 1% 1/4W 0603", Case Code (Imperial)=0603, Case Code (Metric)=1608, Manufacturer=Panasonic, Manufacturer Part Number=ERJ-PA3F2203V, Max Operating Temperature=155°C, Max Power Dissipation=250mW, Min Operating Temperature=-55°C, Resistance=220kR, Supplier Part Number 1=P220KBYCT-ND, Temperature Coefficient=100ppm/°C, Tolerance=1%, Voltage Rating=150V, Case/Package=0603, Category="Chip SMD Resistors", ComponentLink1Description=https://datasheet.ciiva.com/49048/1801181-49048155.pdf?src-supplier=Element14, ComponentLink1URL=https://datasheet.ciiva.com/49048/1801181-49048155.pdf?src-supplier=Element14, ComponentLink2Description=https://datasheet.ciiva.com/22782/1801181-22782469.pdf?src-supplier=Farnell, ComponentLink2URL=https://datasheet.ciiva.com/22782/1801181-22782469.pdf?src-supplier=Farnell, Composition="Thick Film", Depth=0.8mm, Features="Automotive AEC-Q200", Height=0.018inch, LatestRevisionDate=17-Jul-2002, LatestRevisionNote="Re-released for DXP Platform.", Length=0.063inch, Mount="Surface Mount", Number of Terminations=2, PackageDescription="Axial Device, Thru-Hole; 2 Leads; 0.3 in Pin Spacing", PackageReference=AXIAL-0.3, Packaging="Cut Tape", Power Rating=250mW, Pricing 1="1=0.14000, 10=0.12700, 100=0.04900, 1000=0.02156, 2500=0.01862 (USD)", Published=8-Jun-2000, Publisher="Altium Limited", REACH SVHC="No SVHC", RoHS=Yes, Stock 1=88662, Supplier 1=Digi-Key, Termination=Solder, Voltage Rating (DC)=150V, Width=0.031inch
R10: "Resistor", LatestRevisionDate=17-Jul-2002, LatestRevisionNote="Re-released for DXP Platform.", PackageDescription="Axial Device, Thru-Hole; 2 Leads; 0.3 in Pin Spacing", PackageReference=AXIAL-0.3, Published=8-Jun-2000, Publisher="Altium Limited"
R11: "RES SMD 47.5K OHM 0.1% 1/5W 0603", Case Code (Imperial)=0603, Case Code (Metric)=1608, Manufacturer=Panasonic, Manufacturer Part Number=ERJ-PB3B4752V, Max Operating Temperature=155°C, Max Power Dissipation=200mW, Min Operating Temperature=-55°C, Resistance=47.5kR, Supplier Part Number 1=P20163CT-ND, Temperature Coefficient=50ppm/°C, Tolerance=0.1%, Case/Package=0603, Category="Chip SMD Resistors", ComponentLink1Description=https://industrial.panasonic.com/sa/system/files/data/download/catalog/id_fixed-resistors_e_2.pdf?src-supplier=Digi-Key, ComponentLink1URL=https://industrial.panasonic.com/sa/system/files/data/download/catalog/id_fixed-resistors_e_2.pdf?src-supplier=Digi-Key, Composition="Thick Film", Features="Automotive AEC-Q200", Height - Seated (Max)=0.022inch, LatestRevisionDate=17-Jul-2002, LatestRevisionNote="Re-released for DXP Platform.", Length=0.063inch, Number of Terminations=2, PackageDescription="Axial Device, Thru-Hole; 2 Leads; 0.3 in Pin Spacing", PackageReference=AXIAL-0.3, Packaging="Tape and Reel", Pricing 1="1=0.25000, 10=0.21100, 25=0.15320, 50=0.11100, 100=0.08230, 250=0.06316, 500=0.04976, 1000=0.03445 (USD)", Published=8-Jun-2000, Publisher="Altium Limited", RoHS=Yes, Stock 1=9691, Supplier 1=Digi-Key, Width=0.032inch
U1: "Two-Phase Synchronous Step-Down Switching Controller, 28-pin TSSOP, Pb-Free", Manufacturer="National Semiconductor", PackageTopMarking=NSUZXYTTE#*LM2642MTC, PowerWise=N, Supplier Part Number 1=LM2642MTC/NOPB-ND, Code_JEDEC=MO-153-AE, ComponentLink1Description="Manufacturer URL", ComponentLink1URL=http://www.national.com/, ComponentLink2Description="LM2642 Datasheet", ComponentLink2URL=http://www.national.com/ds/LM/LM2642.pdf, ComponentLink3Description="LM2642 Web Page", ComponentLink3URL=http://www.national.com/pf/LM/LM2642.html, ComponentLink4Description="MTC28 Package Page", ComponentLink4URL=http://www.national.com/packaging/folders/mtc28.html, CompType=Switcher, DatasheetVersion=Feb-2006, High-Reliability=Y, PackageDescription="Molded TSSOP, Jedec, 9.7 x 4.4 x 0.9mm Body, 28 Lead, 0.65mm Pitch", PackageReference=MTC28, PackageVersion="revD, Jan-2005", PartNumber=LM2642MTC/NOPB, PinCount=28, RoHS=Y, Supplier 1=Digi-Key

## Free pads (board coordinates)
  round 7.4 hole 3.251: 1(0,0) 1(0,53) 1(53,0) 1(53,53)

## Via types
v1: diameter 0.505, hole 0.2, Top Layer to Bottom Layer, tented both sides, 131 vias

## Nets (pads, with @x,y where several pads share a name; then routed paths per layer and width w, separated by ;. In a path a pad name is that pad's centre, name@x,y a point inside that pad or via, vN(x,y) a via of type N, cw(c..) or ccw(c..) an arc to the next point about the centre after c; other vN are vias at no path point)
+5: F2.2 P2.1 P4.1
+12: F1.1 P3.2 P5.2
CBOOT1: C9.1 D3.2 U1.25 | length 10.3
  Top Layer w0.305: U1.25 17.461,28.678 18.568,27.571 22.193,27.571 23.749,29.127 23.772,29.104 23.772,27.596 D3.2
CBOOT2: C8.1 D3.1 U1.18 | length 10.7
  Top Layer w0.305: U1.18 18.104,24.128 18.65,24.674 22.714,24.674 C8.1@23.836,23.553 ; D3.1 23.836,25.632 C8.1@23.836,23.553 ; C8.1 23.836,23.503 C8.1@23.836,23.553
CH2_EN: C20.2 R9.2 U1.5 U1.10 | length 23.6
  Top Layer w0.305: C20.2 v1(3.343,22.085) ; R9.2 v1(3.343,29.705) 3.381,29.667 3.381,29.032 3.597,28.816 7.788,28.816 8.576,28.028 U1.5 11.086,28.028 11.256,27.858 11.273,27.858 11.852,27.279 11.852,25.528 11.273,24.948 11.256,24.948 11.086,24.778 U1.10
  Bottom Layer w0.305: v1(3.343,22.085) 3.343,22.139 3.521,22.318 3.521,29.473 3.343,29.651 v1(3.343,29.705)
GND: C1.2 C4.2 C5.2 C6.1 C7.1 C10.2 C11.2 C12.1 C15.1 C18.1 C19.1 C20.1 D1.A D2.A P1.1 P1.2 P1.3 P1.4 P1.5 P2.2 P3.1 P4.2 P5.1 Q3.3 Q4.3 R7.1 R8.1 R11.1 R12.1 R13.1 R14.1 U1.8 U1.21 | length 26.4
  Top Layer w0.254: R11.1 R14.1 C20.1 C15.1@0.752,23.94 ; C19.1 R8.1@4.435,23.94
  Top Layer w0.305: C15.1 0.752,23.94 1.616,23.077 3.521,23.077 4.137,23.693 4.187,23.693 4.435,23.94 R8.1 ; R13.1 R12.1 v1(0.752,36.401) ; v1(2.077,28.678) C18.1 C12.1 ; v1(3.381,31.61) R7.1 ; v1(4.435,21.292) C19.1 ; v1(9.058,26.078) U1.8 ; C1.2 v1(10.287,38.214) ; v1(11.598,16.243) 11.611,16.256 C6.1 ; C7.1 15.813,38.159 v1(15.868,38.214) ; U1.21 v1(17.536,26.078)
  other v1: 19.226,-1.876 22.226,-1.876 25.226,-1.876 28.226,-1.876 31.226,-1.876 34.226,-1.876 37.226,-1.876 40.226,-1.876 43.226,-1.876 46.226,-1.876 49.226,-1.876 23.726,1.124 29.726,1.124 32.726,1.124 35.726,1.124 38.726,1.124 41.726,1.124 44.726,1.124 47.726,1.124 41.726,13.124 44.726,13.124 47.726,13.124 50.726,13.124 56.726,13.124 62.726,13.124 65.726,13.124 68.726,13.124 43.226,16.124 46.226,16.124 49.226,16.124 55.226,16.124 58.226,16.124 61.226,16.124 64.226,16.124 67.226,16.124 41.726,19.124 44.726,19.124 47.726,19.124 50.726,19.124 53.726,19.124 56.726,19.124 59.726,19.124 62.726,19.124 65.726,19.124 68.726,19.124 43.226,22.124 46.226,22.124 49.226,22.124 55.226,22.124 58.226,22.124 64.226,22.124 67.226,22.124 41.726,25.124 47.726,25.124 53.726,25.124 56.726,25.124 59.726,25.124 65.726,25.124 68.726,25.124 41.726,37.124 44.726,37.124 47.726,37.124 50.726,37.124 56.726,37.124 59.726,37.124 62.726,37.124 65.726,37.124 68.726,37.124 43.226,40.124 46.226,40.124 49.226,40.124 55.226,40.124 58.226,40.124 64.226,40.124 67.226,40.124 22.226,52.124 31.226,52.124 34.226,52.124 37.226,52.124 40.226,52.124 43.226,52.124 46.226,52.124 26.726,55.124 29.726,55.124 32.726,55.124 35.726,55.124 38.726,55.124 41.726,55.124 44.726,55.124 47.726,55.124
NetC2_1: C2.1 R1.1 U1.13 | length 6.4
  Top Layer w0.254: C2.1 R1.1
  Top Layer w0.305: U1.13 12.106,22.828 12.549,22.385 R1.1
NetC3_2: C3.2 R2.1 U1.2 | length 8.9
  Top Layer w0.305: U1.2 12.381,29.978 15.868,33.465 R2.1 C3.2
NetC8_2: C8.2 R3.1 U1.16 | length 7.3
  Top Layer w0.305: U1.16 17.451,22.828 18.84,24.217 20.061,24.217 20.766,23.512 R3.1 C8.2
NetC9_2: C9.2 R4.1 U1.27 | length 7.8
  Top Layer w0.305: U1.27 16.786,29.978 16.956,29.808 16.977,29.808 18.757,28.028 19.812,28.028 20.264,28.481 20.264,28.93 R4.1 C9.2
NetC12_2: C12.2 U1.6 | length 4.7
  Top Layer w0.305: C12.2 7.29,27.8 7.712,27.378 U1.6
NetC13_1: C13.1 R12.2 | length 2.3
  Top Layer w0.305: R12.2 C13.1
NetC13_2: C13.2 C14.2 U1.3 | length 8.7
  Top Layer w0.305: C13.2 C14.2 5.835,33.465 8.804,30.496 8.804,29.667 9.143,29.328 U1.3
NetC14_1: C14.1 R13.2 | length 2.3
  Top Layer w0.305: R13.2 C14.1
NetC16_1: C16.1 R11.2 | length 2.3
  Top Layer w0.305: R11.2 C16.1
NetC16_2: C16.2 C17.2 U1.12 | length 9.7
  Top Layer w0.254: C16.2 C17.2 v1(7.026,20.18) ; v1(7.026,23.433) 7.053,23.46 10.381,23.46 U1.12
  Bottom Layer w0.254: v1(7.026,20.18) v1(7.026,23.433)
NetC17_1: C17.1 R14.2 | length 2.3
  Top Layer w0.305: R14.2 C17.1
NetC19_2: C19.2 U1.9 | length 7.9
  Top Layer w0.305: C19.2 v1(7.915,22.085) ; v1(7.915,25.387) 7.947,25.42 10.39,25.42 U1.9
  Bottom Layer w0.305: v1(7.915,22.085) v1(7.915,25.387)
NetQ1_2: Q1.2 U1.17 | length 26.5
  Top Layer w0.305: U1.17 16.09,23.47 15.078,23.47 14.468,22.86 14.468,22.359 15.535,21.292 15.535,16.497 v1(17.694,14.338) ; Q1.2 v1(29.251,8.977)
  Bottom Layer w0.305: v1(17.694,14.338) 23.889,14.338 v1(29.251,8.977)
NetQ2_2: Q2.2 U1.26 | length 21.1
  Top Layer w0.305: U1.26 15.412,29.328 15.242,29.498 15.225,29.498 14.847,29.877 14.847,30.73 15.727,31.61 15.908,31.61 18.378,34.081 v1(18.378,40.548) ; v1(23.409,43.929) 24.388,43.929 Q2.2
  Bottom Layer w0.305: v1(18.378,40.548) 21.759,43.929 v1(23.409,43.929)
NetQ3_2: Q3.2 U1.20 | length 40.5
  Top Layer w0.305: v1(15.916,3.162) 15.078,4 15.078,21.044 13.98,22.142 13.98,25.04 14.369,25.428 U1.20 ; Q3.2 28.33,-0.013 v1(29.251,-0.013)
  Bottom Layer w0.305: v1(15.916,3.162) 26.076,3.162 v1(29.251,-0.013)
NetQ4_2: Q4.2 U1.23 | length 40.2
  Top Layer w0.305: v1(15.868,54.851) 15.868,40.548 16.573,39.843 16.573,32.939 15.908,32.274 15.742,32.274 14.39,30.923 14.39,29.414 14.385,29.409 14.385,28.405 14.944,27.846 14.944,27.83 15.225,27.548 15.242,27.548 15.412,27.378 U1.23 ; v1(24.392,54.563) 24.393,54.562 24.393,52.917 Q4.2
  Bottom Layer w0.305: v1(15.868,54.851) 24.171,54.851 24.425,54.597 v1(24.392,54.563)
NetR5_1: R5.1 R8.2 U1.11 | length 10.2
  Top Layer w0.305: R5.1 v1(7.026,25.895) ; v1(5.951,23.038) 5.912,23.077 5.912,23.913 R8.2 8.92,23.99 9.058,24.128 U1.11
  Bottom Layer w0.305: v1(5.951,23.038) 5.883,23.106 5.883,24.752 v1(7.026,25.895)
NetR6_1: R6.1 R7.2 U1.4 | length 6.9
  Top Layer w0.305: R7.2 R6.1 7.777,29.705 8.804,28.678 U1.4
SW1: D2.C L2.1 Q2.3 Q4.1 R4.2 U1.28 | length 23.6
  Top Layer w0.305: U1.28 16.108,30.62 16.812,30.62 18.255,29.177 R4.2 19.112,39.645 21.175,41.708 25.486,41.708 25.665,41.886 Q2.3@25.665,43.936
SW2: D1.C L1.2 Q1.3 Q3.1 R3.2 U1.15 | length 22.7
  Top Layer w0.305: U1.15 18.132,22.178 R3.2@19.366,23.412 ; R3.2 R3.2@19.366,23.412 ; Q1.3@24.511,8.977 24.511,9.662 24.363,9.809 20.404,9.809 19.366,10.847 R3.2@19.366,23.412
VDD: C15.2 D3.3 R10.2 U1.19 U1.24 | length 27.1
  Top Layer w0.254: C15.2 R10.2
  Top Layer w0.305: C15.2 3.154,23.99 3.942,24.778 v1(8.804,24.778) ; v1(14.646,24.778) U1.19 18.108,24.778 19.952,26.623 ; U1.24 17.464,28.028 18.378,27.114 19.461,27.114 19.952,26.623 ; D3.3 19.952,26.623
  Bottom Layer w0.305: v1(8.804,24.778) v1(14.646,24.778)
Vin: C1.1 C2.2 C3.1 C4.1 C5.1 C6.2 C7.2 P1.6 P1.7 P1.8 P1.9 Q1.1 Q2.1 R1.2 R2.2 U1.1 U1.14 U1.22 | length 48.7
  Top Layer w0.254: C6.2 C2.2 R1.2
  Top Layer w0.305: v1(10.39,21.323) 10.399,21.332 U1.14 ; U1.1 10.399,33.289 C1.1 10.401,33.515 R2.2 ; v1(13.503,32.245) 13.541,32.284 13.541,32.539 14.468,33.465 R2.2 ; 13.541,25.857 v1(13.541,29.774) ; v1(13.949,15.227) C6.2 ; R1.2 13.98,20.211 13.98,21.292 v1(14.011,21.323) 14.011,21.35 13.523,21.839 13.523,25.838 14.413,26.728 U1.22 ; C7.2 14.441,37.31 14.441,35.448 C3.1 R2.2 ; v1(20.264,15.227) 20.319,15.227 20.786,14.759 24.363,14.759 24.511,14.612 Q1.1@24.511,13.927
  Bottom Layer w0.305: v1(10.39,21.323) v1(14.011,21.323) ; v1(13.503,32.245) 13.541,32.207 v1(13.541,29.774) ; v1(13.949,15.227) v1(20.264,15.227)
VLIN5: C18.2 R9.1 R10.1 U1.7 | length 13.8
  Top Layer w0.305: R10.1 0.79,25.933 R10.1@0.79,25.983 ; R9.1 0.79,29.668 0.79,27.838 C18.2 0.79,27.763 R10.1@0.79,25.983 ; U1.7 1.535,26.728 R10.1@0.79,25.983
VOUT1: C10.1 F2.1 L2.2 R6.2 | length 52.1
  Top Layer w0.305: R6.2 v1(4.435,30.628) ; v1(7.29,33.465) 7.29,38.025 14.488,45.223 v1(14.488,46.082) ; v1(40.173,46.082) 45.888,46.082 L2.2
  Bottom Layer w0.305: v1(4.435,30.628) 4.444,30.628 7.281,33.465 v1(7.29,33.465) ; v1(14.488,46.082) v1(40.173,46.082)
VOUT2: C11.1 F1.2 L1.1 R5.2 | length 57.5
  Top Layer w0.305: v1(2.805,16.791) 4.335,16.791 v1(14.265,6.861) ; v1(2.949,25.006) 3.838,25.895 R5.2 ; v1(39.284,6.861) 45.919,6.861 L1.1
  Bottom Layer w0.305: v1(2.805,16.791) 2.786,16.81 2.786,24.843 v1(2.949,25.006) ; v1(14.265,6.861) v1(39.284,6.861)
pads on no net: P1.10 P1.11

## Polygon pours and split planes (outlines as drawn)
+5 on Top Layer "+5_L01_P013" (solid, pour order 13): 72.771,40.995 55.613,40.995 55.613,57.962 72.771,57.962
+12 on Top Layer "+12_L01_P012" (solid, pour order 12): 55.732,-5.207 72.771,-5.207 72.771,12.052 55.732,12.052
SW1 on Top Layer "SW1_L01_P008" (solid, pour order 8): 37.991,50.279 16.655,50.279 16.655,41.529 37.991,41.529
SW2 on Top Layer "SW2_L01_P002" (solid, pour order 2): 32.131,11.633 16.891,11.633 16.891,2.319 38.227,2.319 38.227,11.633
GND on Top Layer "GND_L01_P010" (solid, pour order 10): 41.316,40.995 41.316,34.404 72.771,34.404 72.771,40.995
GND on Top Layer "GND_L01_P000" (solid, pour order 0): 72.771,26.37 62.601,26.37 cw(c63.124,31.225) 60.347,27.209 59.762,27.526 ccw(c59.172,26.441) 58.664,27.567 57.798,27.176 cw(c54.892,31.573) 55.732,26.37 40.899,26.37 40.899,12.306 72.771,12.306
GND on Top Layer "GND_L01_P009" (solid, pour order 9): 16.655,57.772 16.655,50.516 55.898,50.516 55.898,57.772
VOUT1 on Top Layer "VOUT1_L01_P007" (solid, pour order 7): 41.129,40.995 41.129,50.279 55.436,50.279 55.436,40.995
GND on Top Layer "GND_L01_P006" (solid, pour order 6): 16.852,2.156 16.852,-4.585 55.626,-4.585 55.626,2.156
VOUT2 on Top Layer "VOUT2_L01_P001" (solid, pour order 1): 40.894,12.052 40.894,2.319 55.613,2.319 55.613,12.052
Vin on Top Layer "VIN_L01_P005" (solid, pour order 5): 21.204,38.126 27.323,30.618 27.323,24.199 21.332,18.208 21.358,11.811 36.576,11.811 36.576,22.416 40.729,26.569 72.771,26.569 72.771,34.404 38.268,34.404 33.909,38.763 33.909,41.389 21.184,41.389
GND on Bottom Layer "GND_L02_P011" (solid, pour order 11): -0.086,-5.093 72.771,-5.093 72.771,58.026 -0.213,58.026 ccw(c-0.213,52.946) -5.293,52.946 -5.293,0.114 ccw(c-0.086,0.114)

## Keep-outs
Keep-Out Layer:
  the board outline again, w0.1

## Silkscreen, mask and mechanical layers (free items; w line width, h text height)
Top Overlay:
  drawing of 34 lines, arcs and shapes, not listed
  text "5V" at 10.582,54.343 h1.52
  text "12V" at 10.582,51.649 h1.52
  text "24V" at 10.582,48.906 h1.52
  text "4502-WB-AV-PDB / REV. A / FEB. 2020" at -3.134,5.575 h0.64
  text "5V" at 10.861,2.807 h1.52
  text "12V" at 10.861,0.112 h1.52
  text "24V" at 10.861,-2.63 h1.52